# Altium PCB En_V1.PcbDoc
Units mil, origin at the board's own origin, x right, y up, seen from the top; angles counter-clockwise.
Board outline 1181.1 x 1181.1 mil, 2 copper layers (Top Layer, Bottom Layer); 7 components, 8 nets, 33 pads, 2 vias.
Unrouted connection lines stored in the file: 1.
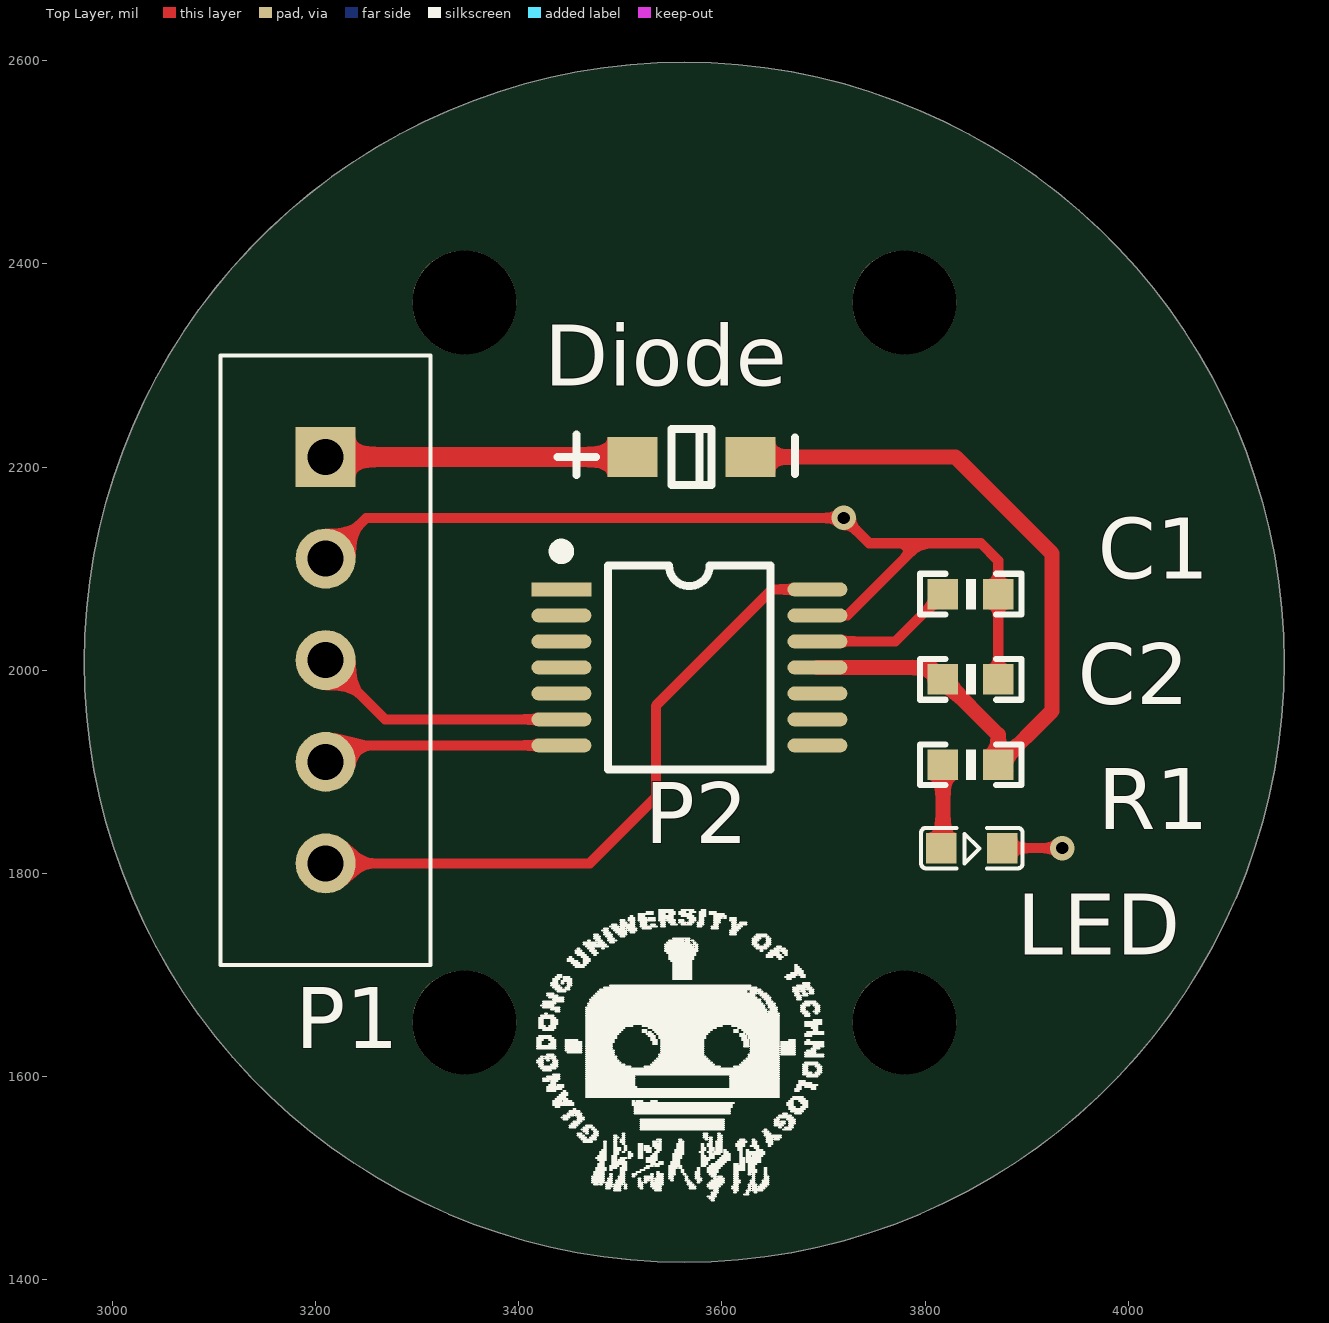
[diagram p0: Top Layer view]
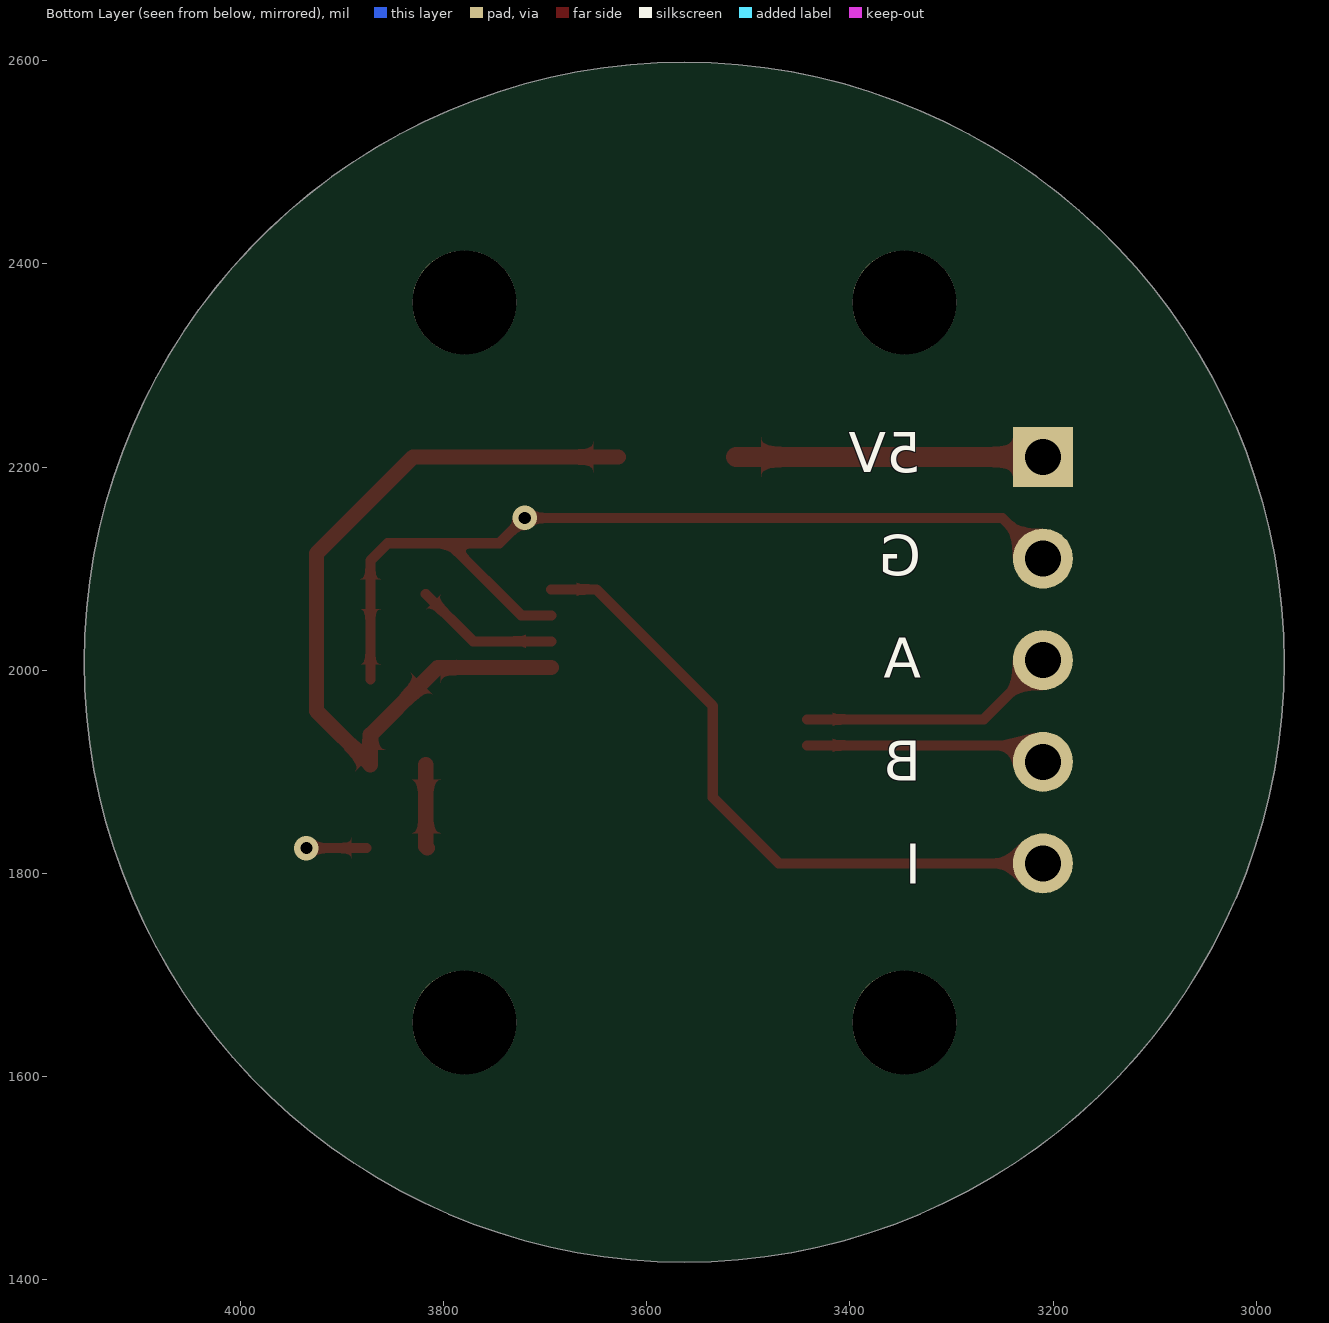
[diagram p1: Bottom Layer view, seen from below]

## Layer stack, top to bottom
Top Solder: solder mask 0.4, Solder Resist, Dk 3.5
Top Layer: signal copper 1.4
Dielectric 1: dielectric 12.6, FR-4, Dk 4.8
Bottom Layer: signal copper 1.4
Bottom Solder: solder mask 0.4, Solder Resist, Dk 3.5

## Board outline
2972.44,2007.87 ccw(c3562.99,2007.87) 3562.99,1417.32 ccw(c3562.99,2007.87) 4153.54,2007.87 ccw(c3562.99,2007.87) 3562.99,2598.43 ccw(c3562.99,2007.87)

## Design rules (kind name [scope] priority, off if disabled: settings)
Clearance [All] p1: gap=8 ignorepadtopadclearanceinfootprint=FALSE
PolygonConnect [All] p1: connectstyle=Relief reliefconductorwidth=10 reliefentries=4 polygonreliefangle="90 Angle" airgapwidth=10
RoutingVias [All] p1: holewidth=28 width=50 viastyle="Through Hole" minholewidth=28 minwidth=50 maxholewidth=28 maxwidth=50
SolderMaskExpansion [All] p1: expansion=4
Width [All] p1: maxlimit=20 minlimit=8 preferedwidth=10
30 further rules are at their usual default settings.

## Components (designator, comment, footprint, x,y, rotation, side; value= is the part's Value field where it differs from the comment)
C1 "1uF" 0603P 3845,2075 r180 top
C2 "100nF" 0603P 3845,1990.98 r180 top
Diode "D1" LC-SOD-123F 3570,2210 r180 top (schematic designator Diode1)
LED "LED1" 0603_LED 3845,1825 r0 top (schematic designator DS?)
P1 "Header 5" MX2.54-5P直针 3210,2210 r270 top
P2 "AS5047P" TSSOP-14 3562.99,2007.87 r0 top locked
R1 "1K" 0603P 3845,1907.09 r180 top

## Footprints (in the part's own frame and the unit in brackets; to place one, negate y for a bottom-side part, rotate by r counter-clockwise, add the part's x,y. Pads: shape width x height; smd on the part's side, far side on the other; paste and mask are expansions set on the pad)
0603_LED [mil]
  rect 30x30 smd: 1(-29,0) 2(31,0)
  silkscreen extent -49,-20 51,20, body extent -40,-25 40,25, height 43
0603P [mil]
  rect 30x30 smd: 1(-27,0) 2(27.5,-0.06)
  silkscreen extent -50,-20 50,20
LC-SOD-123F [mm]
  rect 1.25x1 smd: 1(1.475,0) 2(-1.475,0)
  silkscreen extent -2.59,-0.7 3.35,0.7, body extent -1.9,-0.85 1.85,0.85, height 1.2
MX2.54-5P直针 [mm]
  rect 1.5x1.5 hole 0.9: 1(0,0)
  round 1.5 hole 0.9: 2(2.54,0) 3(5.08,0) 4(7.62,0) 5(10.16,0)
  silkscreen extent -2.54,-2.63 12.7,2.63
TSSOP-14 [mm]
  rect 1.5x0.35 smd: 1(-3.073,1.823)
  oval 1.5x0.35 smd: 2(-3.073,1.173) 3(-3.073,0.523) 4(-3.073,-0.127) 5(-3.073,-0.777) 6(-3.073,-1.427) 7(-3.073,-2.077) 8(3.327,-2.077) 9(3.327,-1.427) 10(3.327,-0.777) 11(3.327,-0.127) 12(3.327,0.523) 13(3.327,1.173) 14(3.327,1.823)
  silkscreen extent -3.2,-2.68 2.16,2.9, body extent -3.08,-2.63 3.33,2.37, height 1.25

## Part data
C1 C2: library part C
Diode: library part 肖特基
LED: library part LED2, "Typical RED, GREEN, YELLOW, AMBER GaAs LED", PackageDocument=Feb-2002, LatestRevisionDate=17-Jul-2002, LatestRevisionNote="Re-released for DXP Platform.", PackageReference=3.2X1.6X1.1, Published=8-Jun-2000, Publisher="Altium Limited"
P1: "Header, 5-Pin", LatestRevisionDate=17-Jul-2002, LatestRevisionNote="Re-released for DXP Platform.", Publisher="Altium Limited"
P2: library part AS5047P-TSSOP14
R1: library part R

## Free pads (board coordinates)
  round 102.36 hole 102.36: 0(3346.46,1653.54) 0(3346.46,2362.2) 0(3779.53,1653.54) 0(3779.53,2362.2)

## Via types
v1: diameter 24, hole 12, Top Layer to Bottom Layer, tented both sides, 2 vias

## Nets (pads, with @x,y where several pads share a name; then routed paths per layer and width w, separated by ;. In a path a pad name is that pad's centre, name@x,y a point inside that pad or via, vN(x,y) a via of type N, cw(c..) or ccw(c..) an arc to the next point about the centre after c; other vN are vias at no path point)
5V: C2.2 Diode.2 P2.11 R1.1 | length 801.1
  Top Layer w15: Diode.2 3830,2210 3925,2115 3925,1960.09 R1.1 3872,1936.54 C2.2 3805.67,2002.87 P2.11
A: P1.3 P2.6 | length 256.2
  Top Layer w10: P1.3 3268.31,1951.69 P2.6
B: P1.4 P2.7 | length 238.7
  Top Layer w10: P1.4 3226.1,1926.1 P2.7
GND: C1.1 C2.1 LED.2 P1.2 P2.13 | length 1001.9
  Top Layer w10: P1.2 3250,2150 v1(3720,2150) 3745,2125 3794.53,2125 ; P2.13 3723.58,2054.06 3794.53,2125 ; C2.1 C1.1 3872,2108 3855,2125 3794.53,2125 ; LED.2 v1(3935,1825)
I: P1.5 P2.14 | length 648.4
  Top Layer w10: P1.5 3470,1810 3535,1875 3535,1965 3649.65,2079.65 P2.14
NetC1_2: C1.2 P2.12 | length 142.8
  Top Layer w10: P2.12 3770.9,2028.46 C1.2
NetDS?_1: LED.1 R1.2 | length 82.8
  Top Layer w15: LED.1 3817.5,1826.5 R1.2
VBAT: Diode.1 P1.1 | length 301.9
  Top Layer w20: P1.1 Diode.1
pads on no net: P2.1 P2.2 P2.3 P2.4 P2.5 P2.8 P2.9 P2.10

## Other copper
Top Layer:
  pour cut-out: 3260,1935 3260,1970.26 3250.26,1980 3172.47,1980 3172.47,1941.88 3182.45,1931.91 3255.86,1931.91
  pour cut-out: 3254.83,1939.36 3256.9,1941.43 3256.9,1944.36

## Silkscreen, mask and mechanical layers (free items; w line width, h text height)
Top Overlay:
  drawing of 873 lines, arcs and shapes, not listed
Bottom Overlay:
  text "5V" at 3330,2195 h39.37
  text "G" at 3330,2093.75 h39.37
  text "A" at 3330,1992.5 h39.37
  text "B" at 3330,1891.25 h39.37
  text "I" at 3330,1790 h39.37
Mechanical 1:
  circle w10: c3562.99,2007.87 r590.55